# Altium PCB CHARGER_BOARD.PcbDoc
Units mm, origin at the board's own origin, x right, y up, seen from the top; angles counter-clockwise.
Board outline 60.2 x 50.2 mm, 2 copper layers (Top Layer, Bottom Layer), stack 1.071 mm thick; 39 components, 32 nets, 115 pads, 23 vias.
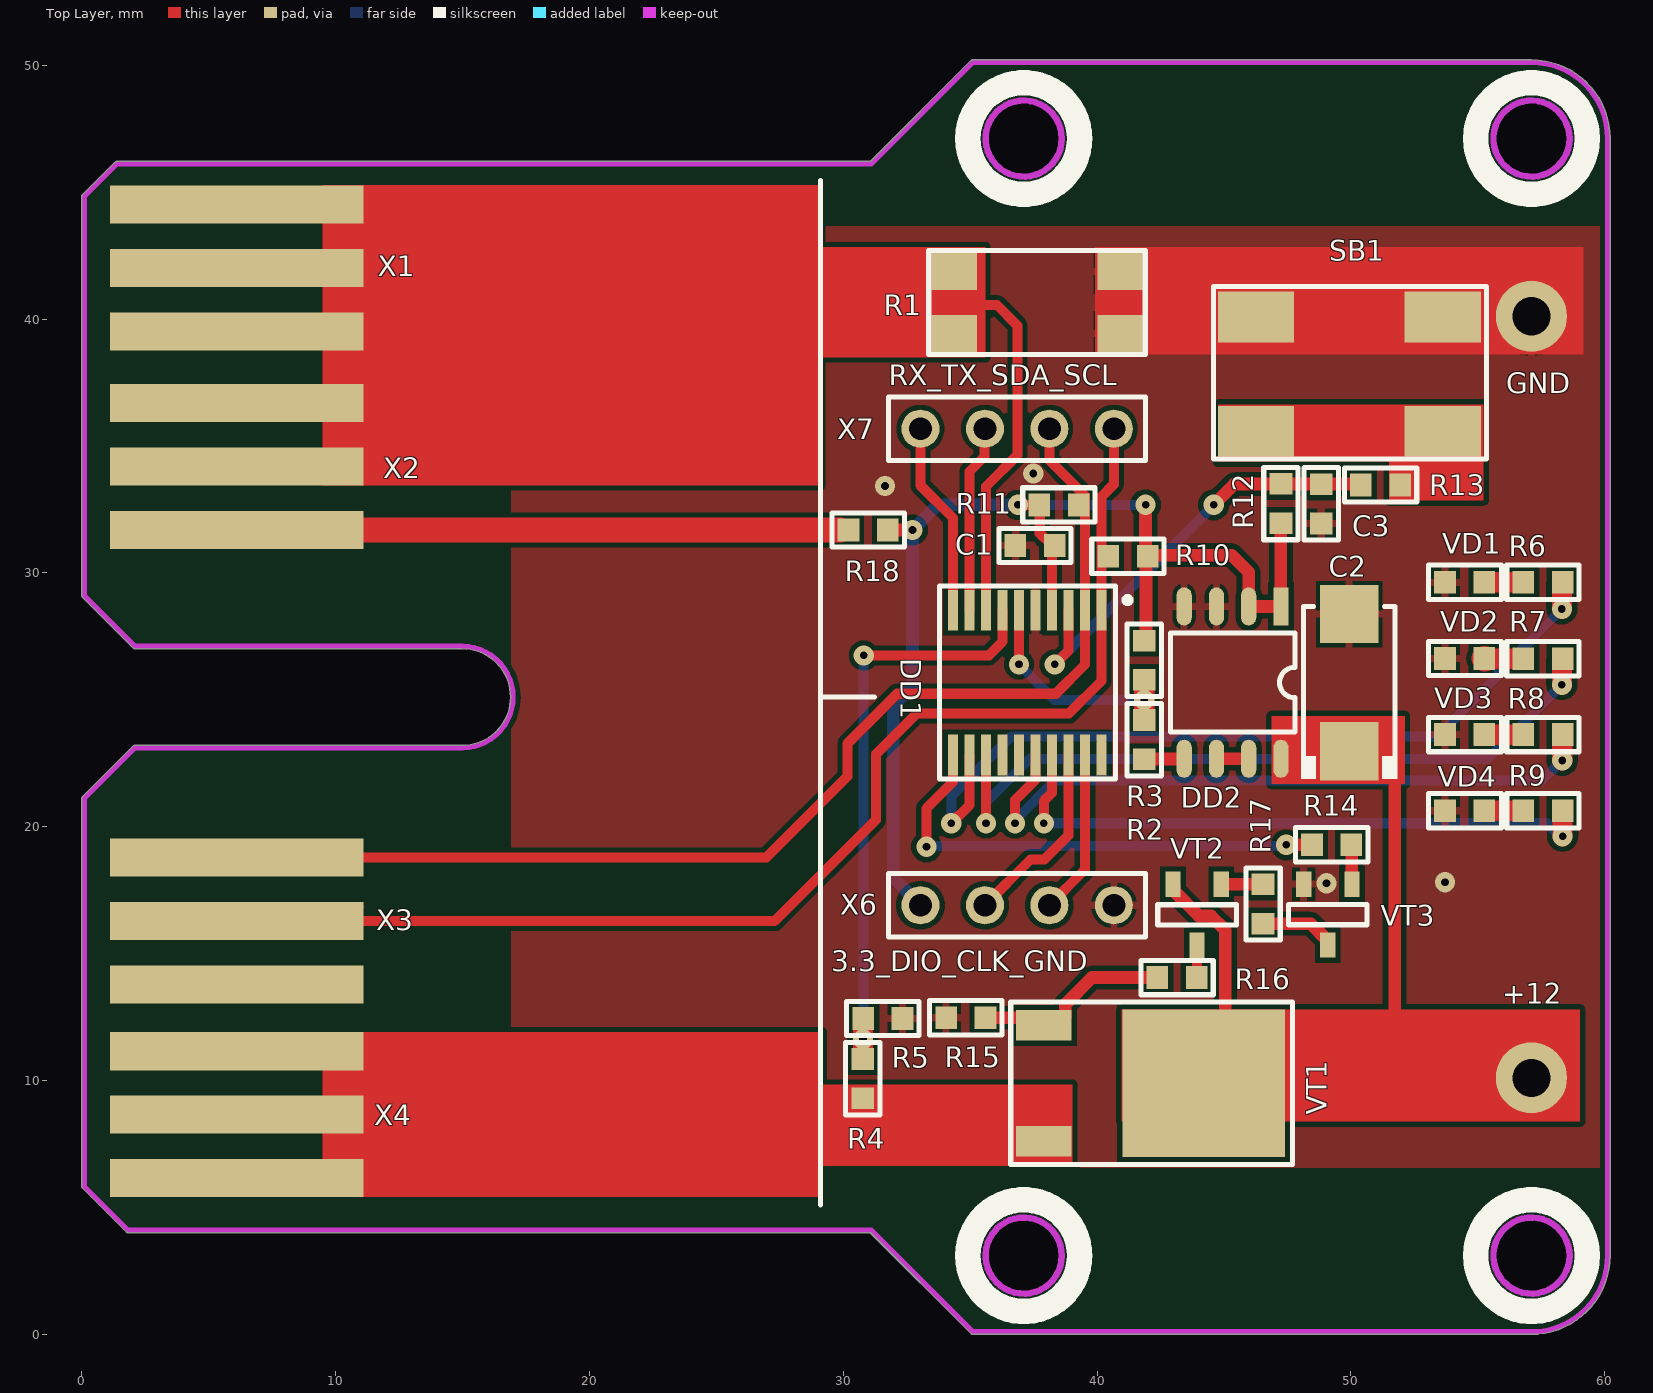
[diagram p0: Top Layer view]
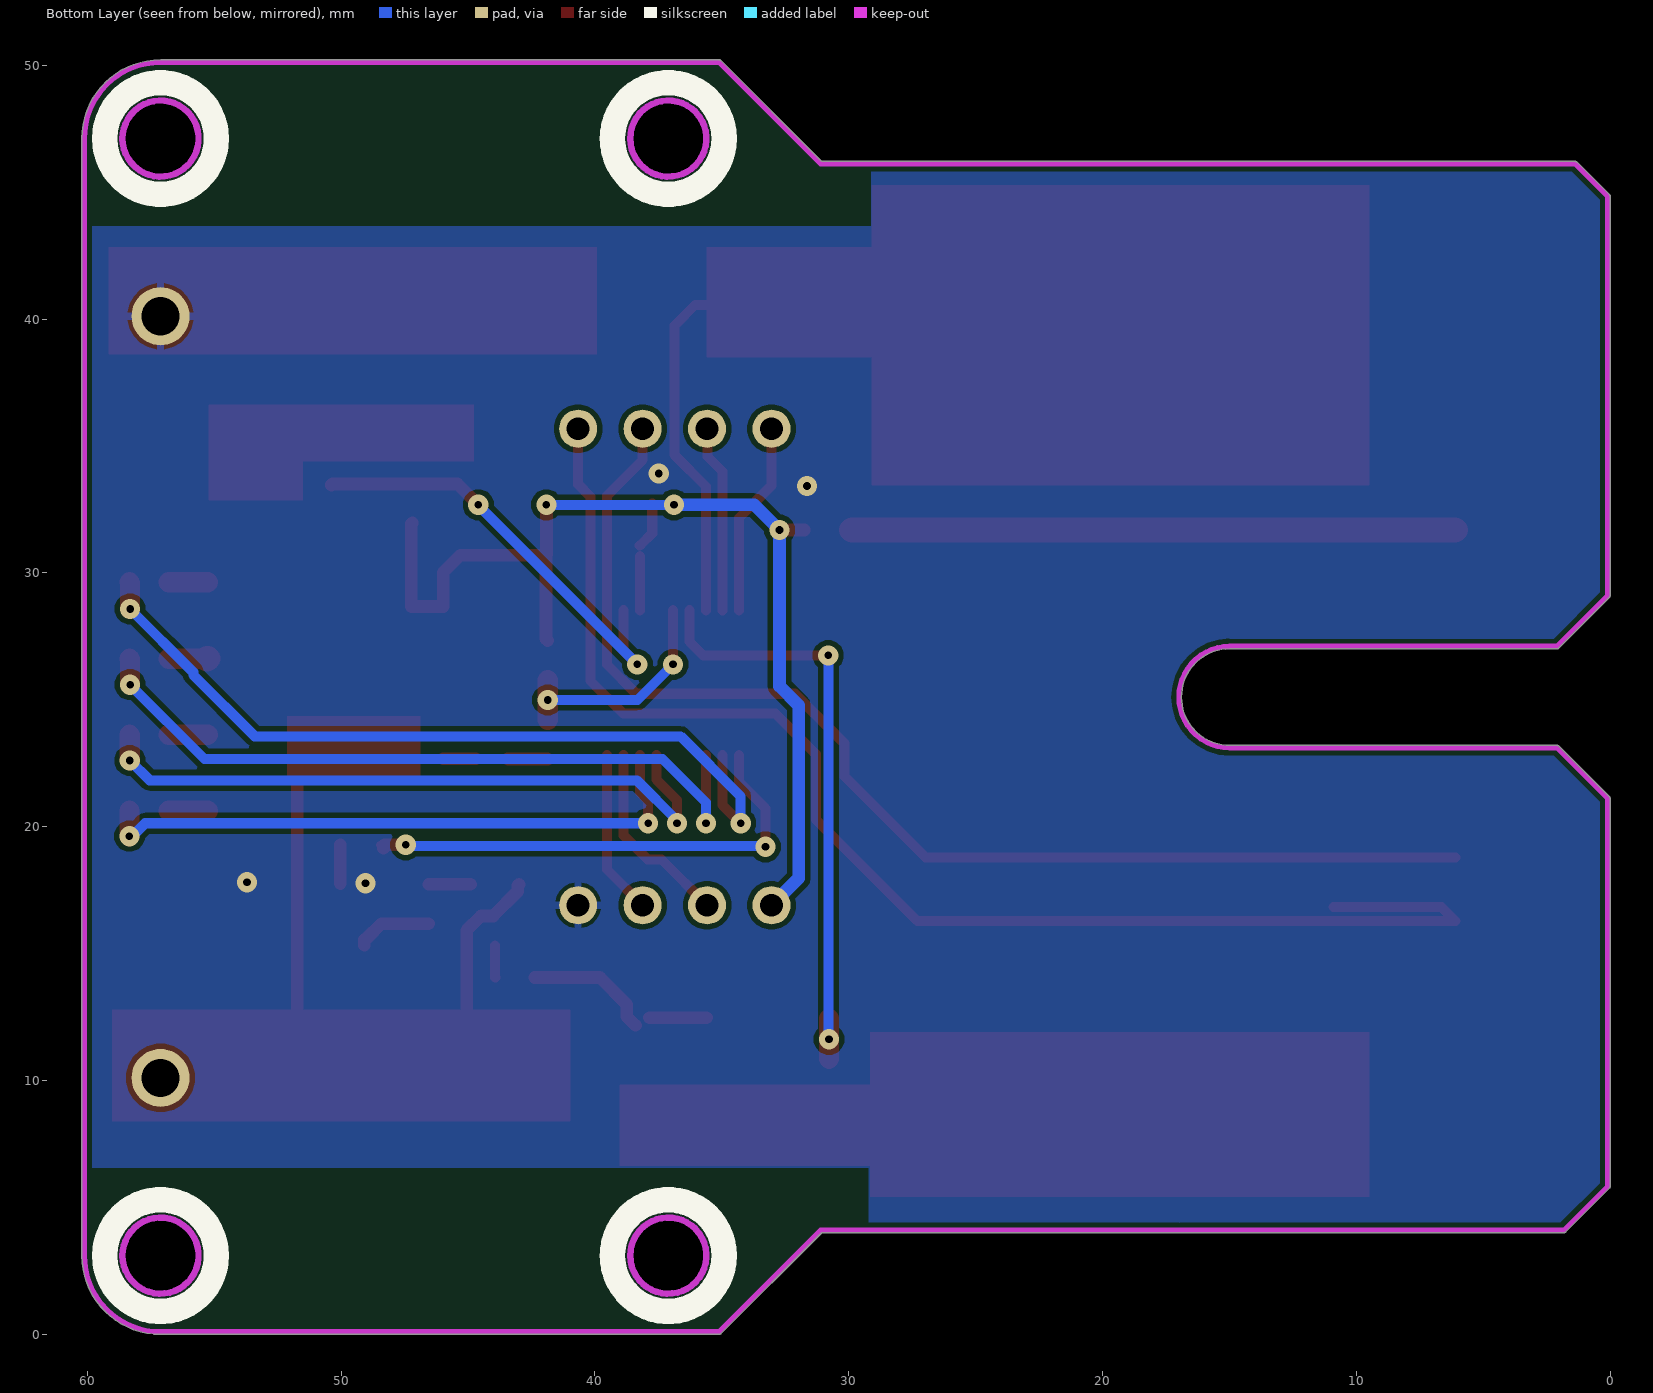
[diagram p1: Bottom Layer view, seen from below]
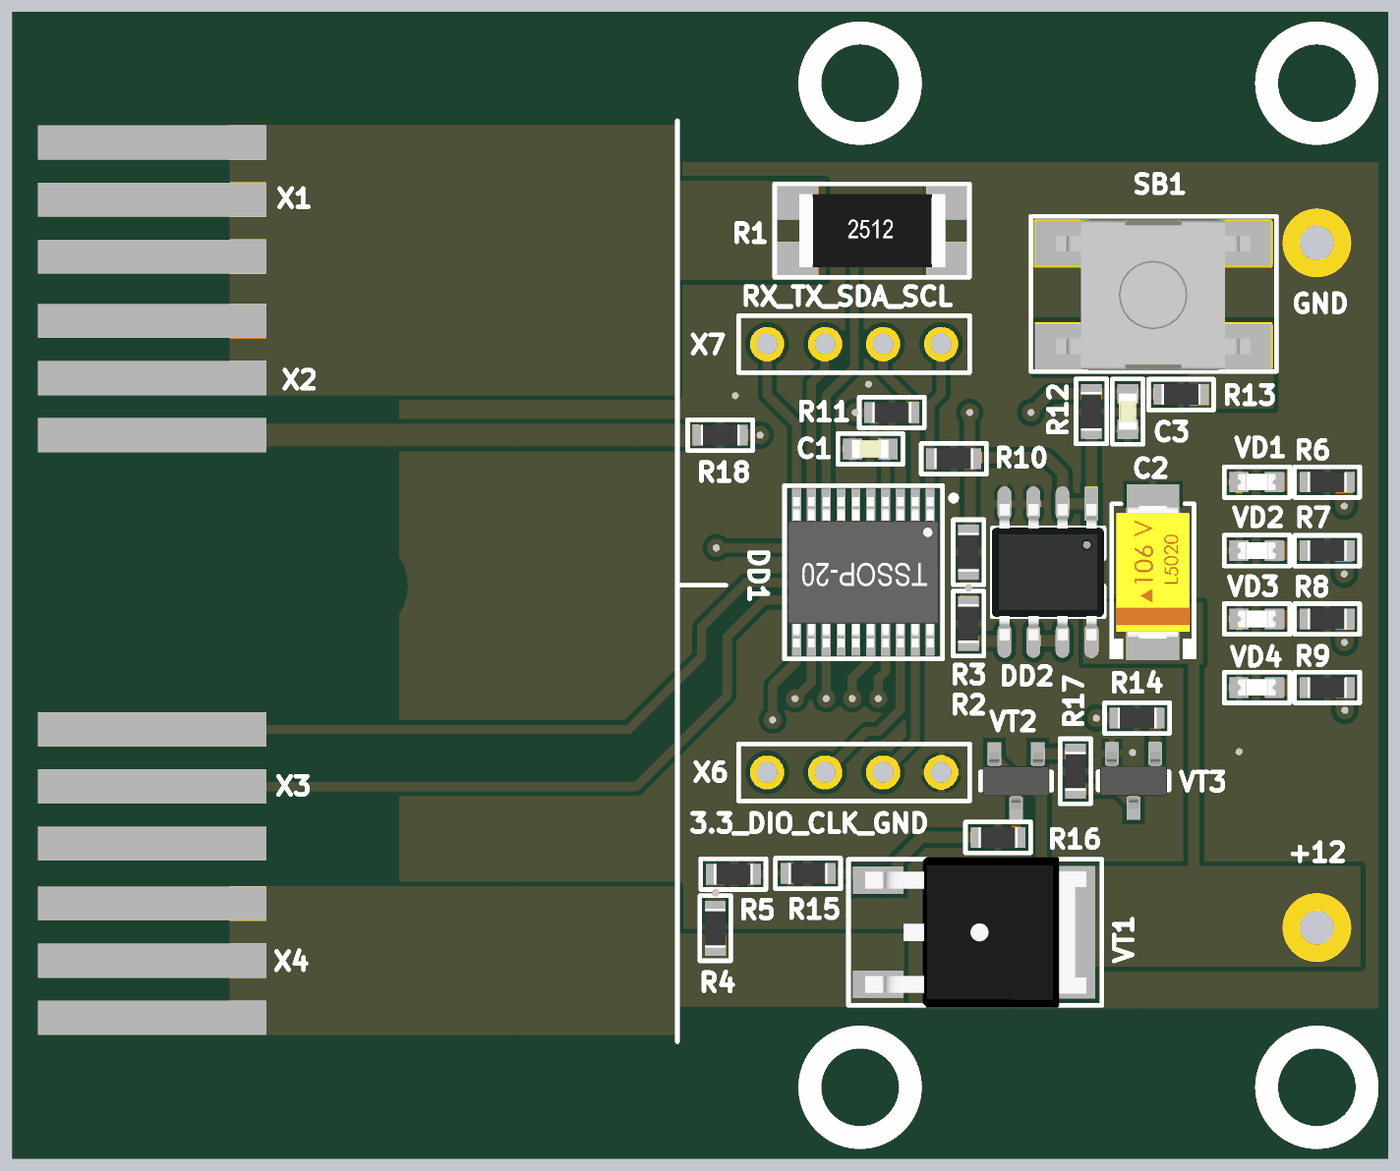
[diagram p2: 3D render of the assembled board from above, using the file's embedded part models]

## Layer stack, top to bottom
Top Solder: solder mask 0.0102, Solder Resist, Dk 3.5
Top Layer: signal copper 0.0356
Dielectric 1: dielectric 1, FR-4, Dk 4.8
Bottom Layer: signal copper 0.0356
Bottom Solder: solder mask 0.0102, Solder Resist, Dk 3.5

## Board outline
0.04,5.768 1.769,4.039 ccw(c1.84,4.11) 1.84,4.01 16.929,4.01 ccw(c16.929,4.11) 16.965,4.016 ccw(c17,4.11) 17,4.01 31.068,4.01 35.039,0.039 ccw(c35.11,0.11) 35.11,0.01 35.95,0.01 57.108,0.01 ccw(c57.11,0.11) 57.11,0.01 ccw(c57.11,3.11) 60.21,3.11 60.21,47.11 ccw(c60.153,47.11) 60.21,47.111 ccw(c57.11,47.11) 57.11,50.21 ccw(c57.11,50.154) 57.109,50.21 35.11,50.21 ccw(c35.11,50.11) 35.038,50.18 31.068,46.21 1.389,46.21 ccw(c1.389,46.109) 1.318,46.18 0.039,44.901 ccw(c0.11,44.83) 0.01,44.83 0.01,29.11 ccw(c0.11,29.11) 0.039,29.039 2.038,27.04 ccw(c2.11,27.11) 2.11,27.01 15,27.01 cw(c15,25.11) 16.9,25.11 cw(c15,25.11) 15,23.21 2.11,23.21 ccw(c2.11,23.11) 2.038,23.18 0.039,21.181 ccw(c0.11,21.11) 0.01,21.11 0.01,5.84 ccw(c0.11,5.84)
cut-out: 55.61,47.11 ccw(c57.11,47.11) 57.11,45.61 ccw(c57.11,47.11) 58.61,47.11 ccw(c57.11,47.11) 57.11,48.61 ccw(c57.11,47.11)
cut-out: 55.61,3.11 ccw(c57.11,3.11) 57.11,1.61 ccw(c57.11,3.11) 58.61,3.11 ccw(c57.11,3.11) 57.11,4.61 ccw(c57.11,3.11)
cut-out: 35.61,47.11 ccw(c37.11,47.11) 37.11,45.61 ccw(c37.11,47.11) 38.61,47.11 ccw(c37.11,47.11) 37.11,48.61 ccw(c37.11,47.11)
cut-out: 35.61,3.11 ccw(c37.11,3.11) 37.11,1.61 ccw(c37.11,3.11) 38.61,3.11 ccw(c37.11,3.11) 37.11,4.61 ccw(c37.11,3.11)

## Design rules (kind name [scope] priority, off if disabled: settings)
Clearance [All] p1: gap=0.2 ignorepadtopadclearanceinfootprint=FALSE except(0.15: SMDPad-SMDPad)
DiffPairsRouting [All] p1: maxlimit=0.254 minlimit=0.254 mostfreqgap=0.254 substack1={A23D90DD-733B-49C5-8102-56B3D284E3A0} toplayer_{a23d90dd-733b-49c5-8102-56b3d284e3a0}_minwidth=0.381 toplayer_{a23d90dd-733b-49c5-8102-56b3d284e3a0}_maxwidth=0.381 toplayer_{a23d90dd-733b-49c5-8102-56b3d284e3a0}_prefwidth=0.381 bottomlayer_{a23d90dd-733b-49c5-8102-56b3d284e3a0}_minwidth=0.381 bottomlayer_{a23d90dd-733b-49c5-8102-56b3d284e3a0}_maxwidth=0.381 bottomlayer_{a23d90dd-733b-49c5-8102-56b3d284e3a0}_prefwidth=0.381 toplayer_minwidth=0.381 toplayer_maxwidth=0.381 toplayer_prefwidth=0.381 bottomlayer_minwidth=0.381 bottomlayer_maxwidth=0.381 bottomlayer_prefwidth=0.381 substack2={0B3DB408-A969-412D-8C07-BA8AE97219D9} toplayer_{0b3db408-a969-412d-8c07-ba8ae97219d9}_minwidth=0.381 toplayer_{0b3db408-a969-412d-8c07-ba8ae97219d9}_maxwidth=0.381 toplayer_{0b3db408-a969-412d-8c07-ba8ae97219d9}_prefwidth=0.381 bottomlayer_{0b3db408-a969-412d-8c07-ba8ae97219d9}_minwidth=0.381 bottomlayer_{0b3db408-a969-412d-8c07-ba8ae97219d9}_maxwidth=0.381 bottomlayer_{0b3db408-a969-412d-8c07-ba8ae97219d9}_prefwidth=0.381 substack3={378827E6-B38F-4565-9D2F-710D8D441C30} toplayer_{378827e6-b38f-4565-9d2f-710d8d441c30}_minwidth=0.381 toplayer_{378827e6-b38f-4565-9d2f-710d8d441c30}_maxwidth=0.381 toplayer_{378827e6-b38f-4565-9d2f-710d8d441c30}_prefwidth=0.381 bottomlayer_{378827e6-b38f-4565-9d2f-710d8d441c30}_minwidth=0.381 bottomlayer_{378827e6-b38f-4565-9d2f-710d8d441c30}_maxwidth=0.381 bottomlayer_{378827e6-b38f-4565-9d2f-710d8d441c30}_prefwidth=0.381 substack4={1E65D4A7-266F-4925-B814-5E9C4A66F8EE} toplayer_{1e65d4a7-266f-4925-b814-5e9c4a66f8ee}_minwidth=0.381 toplayer_{1e65d4a7-266f-4925-b814-5e9c4a66f8ee}_maxwidth=0.381 toplayer_{1e65d4a7-266f-4925-b814-5e9c4a66f8ee}_prefwidth=0.381 bottomlayer_{1e65d4a7-266f-4925-b814-5e9c4a66f8ee}_minwidth=0.381 bottomlayer_{1e65d4a7-266f-4925-b814-5e9c4a66f8ee}_maxwidth=0.381 bottomlayer_{1e65d4a7-266f-4925-b814-5e9c4a66f8ee}_prefwidth=0.381 substack5={93C5D03E-862D-45F8-9871-970EEA9B3F11} toplayer_{93c5d03e-862d-45f8-9871-970eea9b3f11}_minwidth=0.381 toplayer_{93c5d03e-862d-45f8-9871-970eea9b3f11}_maxwidth=0.381 toplayer_{93c5d03e-862d-45f8-9871-970eea9b3f11}_prefwidth=0.381 bottomlayer_{93c5d03e-862d-45f8-9871-970eea9b3f11}_minwidth=0.381 bottomlayer_{93c5d03e-862d-45f8-9871-970eea9b3f11}_maxwidth=0.381 bottomlayer_{93c5d03e-862d-45f8-9871-970eea9b3f11}_prefwidth=0.381 maxuncoupledlength=12.7
HoleSize [All] p1: absolutevalues=TRUE maxlimit=6 minlimit=0.01 maxpercent=80.000 minpercent=20.000
HoleToHoleClearance [All] p1: gap=0.1 allowstackedmicrovias=TRUE
MinimumSolderMaskSliver [All] p1: minsoldermaskwidth=0.1
PlaneConnect [All] p1: pad.planeconnectstyle=Relief pad.reliefexpansion=0.5 pad.reliefentries=4 pad.reliefconductorwidth=0.5 pad.reliefairgap=0.15 via.planeconnectstyle=Direct via.reliefexpansion=0.5 via.reliefentries=4 via.reliefconductorwidth=0.5 via.reliefairgap=0.15
PolygonConnect VQFN20 [HasFootprint('VQFN20')] p1: connectstyle=Direct reliefconductorwidth=0.254 reliefentries=4 polygonreliefangle="90 Angle" airgapwidth=0.254
PolygonConnect [All] p2: thpad.connectstyle=Relief thpad.reliefconductorwidth=0.3 thpad.reliefentries=4 thpad.polygonreliefangle="90 Angle" thpad.airgapwidth=0.15 smdpad.connectstyle=Relief smdpad.reliefconductorwidth=0.3 smdpad.reliefentries=4 smdpad.polygonreliefangle="90 Angle" smdpad.airgapwidth=0.15 via.connectstyle=Direct via.reliefconductorwidth=0.3 via.reliefentries=4 via.polygonreliefangle="90 Angle" via.airgapwidth=0.15
RoutingVias [All] p1: holewidth=0.1 width=0.1 viastyle="Through Hole" minholewidth=0.11 minwidth=0.1 maxholewidth=2 maxwidth=1
ShortCircuit [All] p1: allowed=TRUE
SilkToSolderMaskClearance [IsPad] p1: minsilkscreentomaskgap=0.1 clearancetoexposedcopper=TRUE
SolderMaskExpansion SolderMaskExpansion_Via [IsVia] p1: expansion=0.102 istentingtop=TRUE
SolderMaskExpansion [All] p2: expansion=0.01 istentingtop=FALSE
UnRoutedNet [All] p1: checkbadconnections=TRUE
Width [All] p1: maxlimit=5 minlimit=0.2 preferedwidth=0.3 substack1={A23D90DD-733B-49C5-8102-56B3D284E3A0} substack2={0B3DB408-A969-412D-8C07-BA8AE97219D9} substack3={378827E6-B38F-4565-9D2F-710D8D441C30} substack4={1E65D4A7-266F-4925-B814-5E9C4A66F8EE} substack5={93C5D03E-862D-45F8-9871-970EEA9B3F11}
22 further rules are at their usual default settings.

## Components (designator, comment, footprint, x,y, rotation, side; value= is the part's Value field where it differs from the comment)
+12 "Test_Point_PCB" Point 57.11,10.11 r0 top locked
C1 "CAP-NON-POLAR" CAP-0603 37.555,31.08 r0 top
C2 "CAP-POLAR" CAP-TAN-C 49.93,25.68 r90 top
C3 "100nF" CAP-0603 48.83,32.72 r90 top
DD1 "STM32G030F6P6TR" TSSOP-20 37.25,25.68 r270 top locked
DD2 "LP2951" SO8-150 45.34,25.68 r270 top
GND "Test_Point_PCB" Point 57.11,40.11 r0 top
R1 "100m" RES-2512 37.646,40.65 r0 top
R2 "10K" RES-0603 41.86,23.43 r270 top
R3 "10K" RES-0603 41.86,26.56 r270 top
R4 "51K" RES-0603 30.77,10.08 r90 top
R5 "10K" RES-0603 31.56,12.45 r0 top
R6 "220" RES-0603 57.56,29.63 r0 top
R7 "220" RES-0603 57.56,26.62 r0 top
R8 "220" RES-0603 57.56,23.63 r0 top
R9 "220" RES-0603 57.56,20.63 r0 top
R10 "10K" RES-0603 41.214,30.655 r180 top
R11 "10K" RES-0603 38.496,32.68 r0 top
R12 "10K" RES-0603 47.24,32.73 r270 top
R13 "1K" RES-0603 51.165,33.465 r0 top
R14 "2K" RES-0603 49.24,19.29 r0 top
R15 "100K" RES-0603 34.83,12.48 r0 top
R16 "220" RES-0603 43.15,14.06 r0 top
R17 "2K" RES-0603 46.54,16.96 r270 top
R18 "1K" RES-0603 30.985,31.69 r0 top
SB1 "BUTTON-TACT-4PIN" "TACTB-6x6 SMD" 49.94,37.83 r180 top
VD1 "LED" LED-0603 54.48,29.63 r0 top
VD2 "LED" LED-0603 54.48,26.63 r0 top
VD3 "LED" LED-0603 54.48,23.63 r0 top
VD4 "LED" LED-0603 54.48,20.63 r0 top
VT1 "MOSFET-N-GDS" TO252 42.1,9.9 r270 top
VT2 "BC857-BEC" SOT23-3 43.94,16.53 r270 top
VT3 "BC847-BEC" SOT23-3 49.086,16.542 r270 top
X1 "CONN-3-PIN" 4-SMD 6.11,42.01 r90 top locked
X2 "CONN-3-PIN" 4-SMD 6.11,34.19 r270 top locked
X3 "CONN-3-PIN" 4-SMD 6.11,16.29 r270 top locked
X4 "CONN-3-PIN" 4-SMD 6.11,8.66 r270 top locked
X6 "CONN-4-PIN" CONN-PLS-4-2.54mm 40.66,16.91 r180 top locked
X7 "CONN-4-PIN" CONN-PLS-4-2.54mm 40.66,35.68 r180 top locked

## Footprints (in the part's own frame and the unit in brackets; to place one, negate y for a bottom-side part, rotate by r counter-clockwise, add the part's x,y. Pads: shape width x height; smd on the part's side, far side on the other; paste and mask are expansions set on the pad)
4-SMD [mm]
  rect 1.5x10 smd: 1(-2.5,0) 2(0,0) 3(2.5,0)
CAP-0603 [mm]
  rect 0.85x0.9 smd: 1(-0.775,0) 2(0.775,0)
  silkscreen extent -1.43,-0.67 1.43,0.67, body extent -0.8,-0.4 0.8,0.4, height 0.8
CAP-TAN-C [mm]
  rect 2.3x2.3 smd: 1(-2.7,0) 2(2.7,0)
  silkscreen extent -3.8,-1.9 3,1.9, body extent -2.9,-1.6 2.9,1.6, height 2.6
CONN-PLS-4-2.54mm [mm]
  round 1.5 hole 0.9: 1(0,0) 2(2.54,0) 3(5.08,0) 4(7.62,0)
  silkscreen extent -1.25,-1.25 8.87,1.25
LED-0603 [mm]
  rect 0.85x0.9 smd: 1(-0.775,0) 2(0.775,0)
  silkscreen extent -1.43,-0.67 1.45,0.67, body extent -0.83,-0.36 0.82,0.36, height 0.68
Point [mm]
  round 2.8 / inner round 2.286 / far side round 2.286 hole 1.5 paste+0.102 mask+0.102: 1(0,0)
RES-0603 [mm]
  rect 0.85x0.9 smd: 1(-0.775,0) 2(0.775,0)
  silkscreen extent -1.43,-0.67 1.43,0.67, body extent -0.85,-0.45 0.85,0.45, height 0.55
RES-2512 [mm]
  rect 1.8x1.45 smd: 1(-3.275,-1.225) 1(-3.275,1.225) 2(3.275,-1.225) 2(3.275,1.225)
  silkscreen extent -4.28,-2.05 4.25,2.05, body extent -3.2,-1.6 3.2,1.6, height 0.6
SO8-150 [mm]
  rect 1.5x0.6 smd: 1(-3,1.9)
  oval 1.5x0.6 smd: 2(-3,0.63) 3(-3,-0.64) 4(-3,-1.91) 5(3,-1.91) 6(3,-0.64) 7(3,0.63) 8(3,1.9)
  silkscreen extent -1.95,-2.45 1.95,2.45, body extent -3,-2.45 3,2.45, height 1.7
SOT23-3 [mm]
  rect 1x0.6 smd: 1(-1.2,0.95) 2(-1.2,-0.95) 3(1.2,0)
  silkscreen extent -0.4,-1.55 0.4,1.55, body extent -1.25,-1.46 1.23,1.46, height 1.02
"TACTB-6x6 SMD" [mm]
  rect 3x2 smd paste+0 mask+0.05: 1(-3.675,2.25) 2(3.675,2.25) 3(-3.675,-2.25) 4(3.675,-2.25)
  silkscreen extent -5.4,-3.45 5.35,3.35, body extent -4.25,-3.3 4.25,3.3, height 3.7
TO252 [mm]
  rect 1.2x2.2 smd: 1(-2.28,-4.2) 3(2.28,-4.2)
  rect 5.8x6.4 smd: 2(0,2.1)
  silkscreen extent -3.2,-5.5 3.2,5.6, body extent -3.29,-4.77 3.29,4.93, height 2.3
TSSOP-20 [mm]
  rect 1.6x0.4 smd: 1(-2.85,2.925) 2(-2.85,2.275) 3(-2.85,1.625) 4(-2.85,0.975) 5(-2.85,0.325) 6(-2.85,-0.325) 7(-2.85,-0.975) 8(-2.85,-1.625) 9(-2.85,-2.275) 10(-2.85,-2.925) 11(2.85,-2.925) 12(2.85,-2.275) 13(2.85,-1.625) 14(2.85,-0.975) 15(2.85,-0.325) 16(2.85,0.325) 17(2.85,0.975) 18(2.85,1.625) 19(2.85,2.275) 20(2.85,2.925)
  silkscreen extent -3.8,-3.45 3.8,4.06, body extent -3.3,-3.3 3.3,3.3, height 1.2

## Part data
+12 GND: library part POINT
C3: library part CAP-NON-POLAR
R1 R2 R3 R4 R5 R6 R7 R8 R9 R10 R11 R12 R13 R14 R15 R16 R17 R18: library part RES-CONST

## Via types
v1: diameter 0.8, hole 0.3, Top Layer to Bottom Layer, tented both sides, 23 vias

## Nets (pads, with @x,y where several pads share a name; then routed paths per layer and width w, separated by ;. In a path a pad name is that pad's centre, name@x,y a point inside that pad or via, vN(x,y) a via of type N, cw(c..) or ccw(c..) an arc to the next point about the centre after c; other vN are vias at no path point)
3.3V: C1.2 DD1.4 DD2.1 DD2.2 R3.1 R10.1 R11.1 R12.2 R18.2 X6.4 | length 46.5
  Top Layer w0.4: v1(36.886,32.68) R11.1 ; R11.1@37.743,32.725 37.743,31.56 38.183,31.12 C1.2@38.183,31.095 ; C1.2@38.223,31.08 C1.2@38.233,31.08 ; DD1.4 C1.2@38.225,30.655
  Top Layer w0.5: R18.2 v1(32.73,31.69) ; R3.1 41.924,27.399 41.924,30.591 R10.1 ; v1(41.91,32.68) 41.91,30.734 R10.1 ; R12.2@47.2,31.965 47.24,31.925 DD2.1 DD2.2 45.97,30.03 45.3,30.7 42.034,30.7 R10.1
  Bottom Layer w0.4: v1(36.886,32.68) v1(41.91,32.68)
  Bottom Layer w0.5: X6.4 31.97,17.98 31.97,24.779 32.73,25.539 v1(32.73,31.69) 33.72,32.68 v1(36.886,32.68)
12V: R4.1 VT1.3 X4.1 X4.2 X4.3
BUTTON: C3.2 DD1.3 R12.1 R13.1 | length 17.4
  Top Layer w0.4: v1(38.33,26.395) 38.875,26.94 DD1.3
  Top Layer w0.5: v1(44.59,32.68) 45.415,33.505 48.83,33.505 50.35,33.505 R13.1
  Bottom Layer w0.4: v1(38.33,26.395) 38.33,26.408 44.59,32.668 v1(44.59,32.68)
CLK: DD1.19 X6.2 | length 6.5
  Top Layer w0.4: X6.2 39.525,18.315 DD1.19
DIO: DD1.18 X6.3 | length 7.6
  Top Layer w0.4: X6.3 37.38,18.71 37.923,18.71 38.875,19.662 DD1.18
GND: C1.1 C2.2 C3.1 DD1.5 DD2.3 DD2.4 GND.1 R1.2 R5.2 R15.1 SB1.3 SB1.4 VD1.1 VD2.1 VD3.1 VD4.1 VT3.2 X6.1
  other v1: 49.036,17.78 53.705,17.81 31.646,33.422 37.48,33.915
I_SENS: DD1.8 R1.1 X1.1 X1.2 X1.3 X2.1 X2.2 | length 18
  Top Layer w0.4: 30.985,40.66 31.095,40.55 36.055,40.55 36.86,39.745 36.86,34.64 35.625,33.405 DD1.8
LED_1: DD1.17 R9.2 | length 24.5
  Top Layer w0.4: v1(37.905,20.14) 37.905,21.021 38.225,21.34 DD1.17
  Top Layer w0.8: v1(58.335,19.63) R9.2
  Bottom Layer w0.4: v1(37.905,20.14) 57.717,20.14 58.227,19.63 v1(58.335,19.63)
LED_2: DD1.16 R8.2 | length 26.7
  Top Layer w0.4: v1(36.767,20.14) 36.767,21.048 37.575,21.857 DD1.16
  Top Layer w0.8: v1(58.32,22.61) 58.32,23.615 R8.2
  Bottom Layer w0.4: v1(36.767,20.14) 36.767,20.248 38.348,21.83 57.54,21.83 v1(58.32,22.61)
LED_3: DD1.13 R7.2 | length 29.1
  Top Layer w0.4: v1(35.625,20.14) DD1.13
  Top Layer w0.8: v1(58.31,25.6) 58.31,26.595 R7.2
  Bottom Layer w0.4: v1(35.625,20.14) 35.625,20.955 37.34,22.67 55.38,22.67 v1(58.31,25.6)
LED_4: DD1.12 R6.2 | length 32.3
  Top Layer w0.4: v1(34.26,20.14) 34.975,20.855 DD1.12
  Top Layer w0.8: v1(58.31,28.58) 58.31,29.605 R6.2
  Bottom Layer w0.4: v1(34.26,20.14) 34.26,21.196 36.624,23.56 53.4,23.56 55.817,25.977 55.817,26.087 v1(58.31,28.58)
NetDD2_5: DD2.5 R2.2 | length 1.6
  Top Layer w0.5: R2.2 41.873,22.668 43.417,22.668 DD2.5
NetDD2_6: DD2.6 DD2.7 | length 1.3
  Top Layer w0.5: DD2.6 DD2.7
NetR6_1: R6.1 VD1.2 | length 1.5
  Top Layer w0.8: VD1.2 R6.1
NetR7_1: R7.1 VD2.2 | length 1.5
  Top Layer w0.8: VD2.2@55.265,26.62 R7.1
  Top Layer w1: VD2.2 VD2.2@55.265,26.62
NetR8_1: R8.1 VD3.2 | length 1.5
  Top Layer w0.8: VD3.2 R8.1
NetR9_1: R9.1 VD4.2 | length 1.5
  Top Layer w0.8: VD4.2 R9.1
NetR13_2: R13.2 SB1.1 SB1.2
NetR14_2: R14.2 VT3.1 | length 1.6
  Top Layer w0.3: R14.2 R14.2@50.025,19.28 ; VT3.1@50.025,17.752 VT3.1
  Top Layer w0.5: VT3.1@50.025,17.752 R14.2@50.025,19.28
NetR15_2: R15.2 R16.1 VT1.1 | length 7.3
  Top Layer w0.5: R15.2 VT1.1@37.85,12.48 ; VT1.1@38.4,12.18 38.75,12.53 38.75,13.01 39.8,14.06 R16.1
NetR16_2: R16.2 VT2.3 | length 1.3
  Top Layer w0.4: R16.2 43.933,14.068 43.933,15.322 VT2.3
NetR17_1: R17.1 VT2.1 | length 1.7
  Top Layer w0.3: VT2.1 VT2.1@44.895,17.735
  Top Layer w0.5: VT2.1@44.895,17.735 R17.1
NetR17_2: R17.2 VT3.3 | length 3
  Top Layer w0.5: R17.2 48.412,16.185 49.005,15.592 49.036,15.592 49.086,15.542 VT3.3
PS_12V: +12.1 C2.1 DD2.8 VT1.2 VT2.2 | length 25
  Top Layer w0.3: DD2.8 47.24,22.841 DD2.8@47.379,22.98 ; C2.1 C2.1@50.72,22.98
  Top Layer w0.5: VT2.2 43.04,17.68 43.04,17.46 44.01,16.49 44.49,16.49 45.05,15.93 45.05,11.02 VT1.2@44.19,10.16 ; C2.1@49.495,23.02 49.93,23.02 50.72,23.02 50.78,23.02 51.72,22.08 51.72,12.32 49.995,10.595
RESET: DD1.6 R2.1 R3.2 | length 9.2
  Top Layer w0.4: v1(36.925,26.395) DD1.6
  Top Layer w0.8: R2.1 v1(41.86,24.995) R3.2
  Bottom Layer w0.4: v1(36.925,26.395) 38.325,24.995 v1(41.86,24.995)
RESET_+3.3v: R18.1 X2.3 | length 23.8
  Top Layer w1: X2.3 R18.1@29.884,31.69
RX: DD1.10 X7.4 | length 7.7
  Top Layer w0.4: X7.4 33.04,33.451 34.325,32.166 DD1.10
SCL: DD1.1 R10.2 X3.2 X7.1 | length 54.7
  Top Layer w0.4: X3.2@10.914,16.84 6.66,16.84 X3.2 27.3,16.29 31.29,20.28 31.29,22.855 32.895,24.46 38.89,24.46 40.175,25.745 DD1.1 40.175,30.655 40.175,33.005 40.66,33.49 X7.1
SDA: DD1.2 R11.2 X3.1 X7.2 | length 47.1
  Top Layer w0.4: X3.1 26.91,18.79 ; 26.97,18.79 30.164,21.984 30.164,23.274 32.13,25.24 38.37,25.24 39.525,26.395 DD1.2 39.525,33.045 38.12,34.45 X7.2
TX: DD1.9 X7.3 | length 7.4
  Top Layer w0.4: DD1.9 34.975,33.995 35.565,34.585 35.565,35.665 X7.3
V_SENS: DD1.7 R4.2 R5.1 | length 23.7
  Top Layer w0.4: v1(30.81,26.75) 35.73,26.75 36.275,27.295 DD1.7
  Top Layer w0.5: R4.2 R4.2@30.778,10.863 ; R5.1@30.778,12.442 R5.1
  Top Layer w0.8: R4.2@30.778,10.863 R5.1@30.778,12.442
  Bottom Layer w0.4: v1(30.778,11.63) 30.794,11.646 30.794,26.734 v1(30.81,26.75)
VT: DD1.11 R14.1 | length 19.4
  Top Layer w0.3: R14.1@48.325,19.15 R14.1
  Top Layer w0.4: v1(33.28,19.21) 33.28,20.725 34.325,21.77 DD1.11
  Top Layer w0.5: v1(47.452,19.29) 48.29,19.29 48.325,19.255 R14.1@48.325,19.15
  Bottom Layer w0.4: v1(33.28,19.21) 33.32,19.25 47.412,19.25 v1(47.452,19.29)
pads on no net: DD1.14 DD1.15 DD1.20 X3.3

## Polygon pours and split planes (outlines as drawn)
GND on Bottom Layer "NONET_L-01_P-001" (solid, remove dead copper, pour order 0): 0.04,50.11 0.04,0.11 60.11,0.11 60.11,50.11
GND on Top Layer "NONET_L-01_P-001" (solid, remove dead copper, pour order 1): 16.929,50.11 16.929,0.11 60.11,0.11 60.11,50.11

## Keep-outs
Keep-Out Layer:
  circle w0.254: c37.11,47.11 r1.5
  circle w0.254: c37.11,3.11 r1.5
  circle w0.254: c57.11,3.11 r1.5
  circle w0.254: c57.11,47.11 r1.5
  lines w0.2: 16.929,4.11 1.84,4.11 0.11,5.84 0.11,21.11 2.11,23.11 15,23.11 ccw(c15,25.11) 15,27.11 2.11,27.11 0.11,29.11 0.11,44.83 1.389,46.109 31.109,46.109 ; 17,4.11 31.11,4.11 35.11,0.11 ; 30.794,46.109 31.109,46.109 35.11,50.11 ; 35.5,50.11 35.11,50.11 ; 35.95,0.11 35.11,0.11 ; 35.11,0.11 57.11,0.11 ccw(c57.11,3.11) 60.11,3.11 60.11,47.11 ccw(c57.11,47.11) 57.11,50.11 35.11,50.11

## Other copper
Top Layer:
  rectangle net NetR13_2: 44.765,34.38 55.19,36.64
  rectangle net NetR13_2: 51.5,32.85 55.22,36.64
  rectangle net PS_12V: 46.87,21.68 52.12,24.36
  rectangle net I_SENS: 26.36,38.48 35.61,42.84
  rectangle net GND: 39.921,38.6 59.16,42.84
  rectangle net PS_12V: 40.96,8.39 59.03,12.8
  rectangle net 12V: 26.54,6.64 39.03,9.85
  rectangle net 12V: 9.49,5.41 29.17,11.92
  rectangle net I_SENS: 9.49,33.44 29.11,45.28
  pour cut-out: 29.21,6.57 29.21,0.11 60.21,0.11 60.21,6.57
  pour cut-out: 29.11,50.11 29.11,43.65 60.11,43.65 60.11,50.11
Bottom Layer:
  pour cut-out: 29.21,6.57 29.21,0.11 60.21,0.11 60.21,6.57
  pour cut-out: 29.11,50.11 29.11,43.65 60.11,43.65 60.11,50.11

## Silkscreen, mask and mechanical layers (free items; w line width, h text height)
Top Overlay:
  circle w1: c57.11,47.11 r2.2
  circle w1: c37.11,47.11 r2.2
  circle w1: c37.11,3.11 r2.2
  circle w1: c57.11,3.11 r2.2
  lines w0.2: 29.11,5.11 29.11,45.46 ; 29.11,25.11 31.23,25.11
  text "RX_TX_SDA_SCL" at 31.797,37.393 h0.8
  text "3.3_DIO_CLK_GND" at 29.53,14.303 h0.8
Bottom Overlay:
  circle w1: c37.11,47.11 r2.2
  circle w1: c57.11,47.11 r2.2
  circle w1: c57.11,3.11 r2.2
  circle w1: c37.11,3.11 r2.2